# Altium PCB Time.PcbDoc
Units mm, origin at the board's own origin, x right, y up, seen from the top; angles counter-clockwise.
Board outline 121.25 x 38.25 mm, 2 copper layers (Top Layer, Bottom Layer); 114 components, 61 nets, 352 pads, 115 vias.
Unrouted connection lines stored in the file: 2.
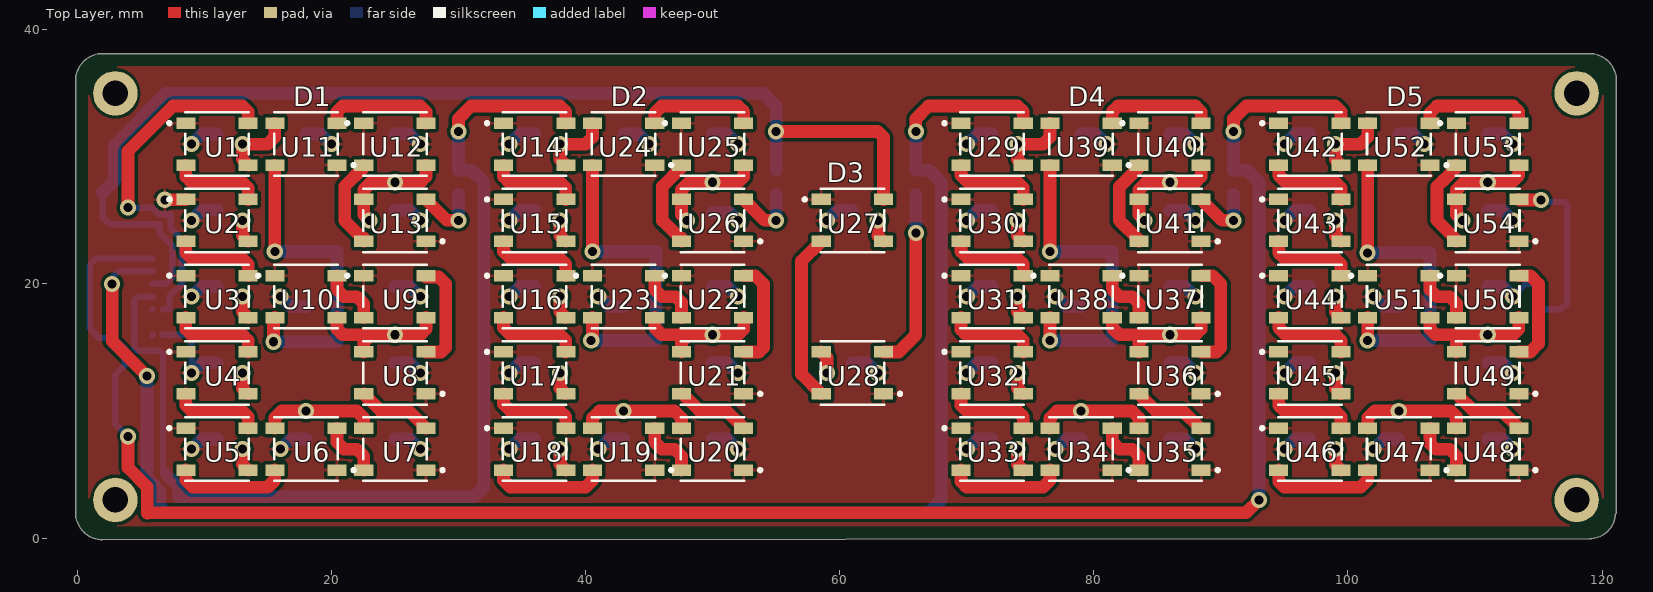
[diagram p0: Top Layer view]
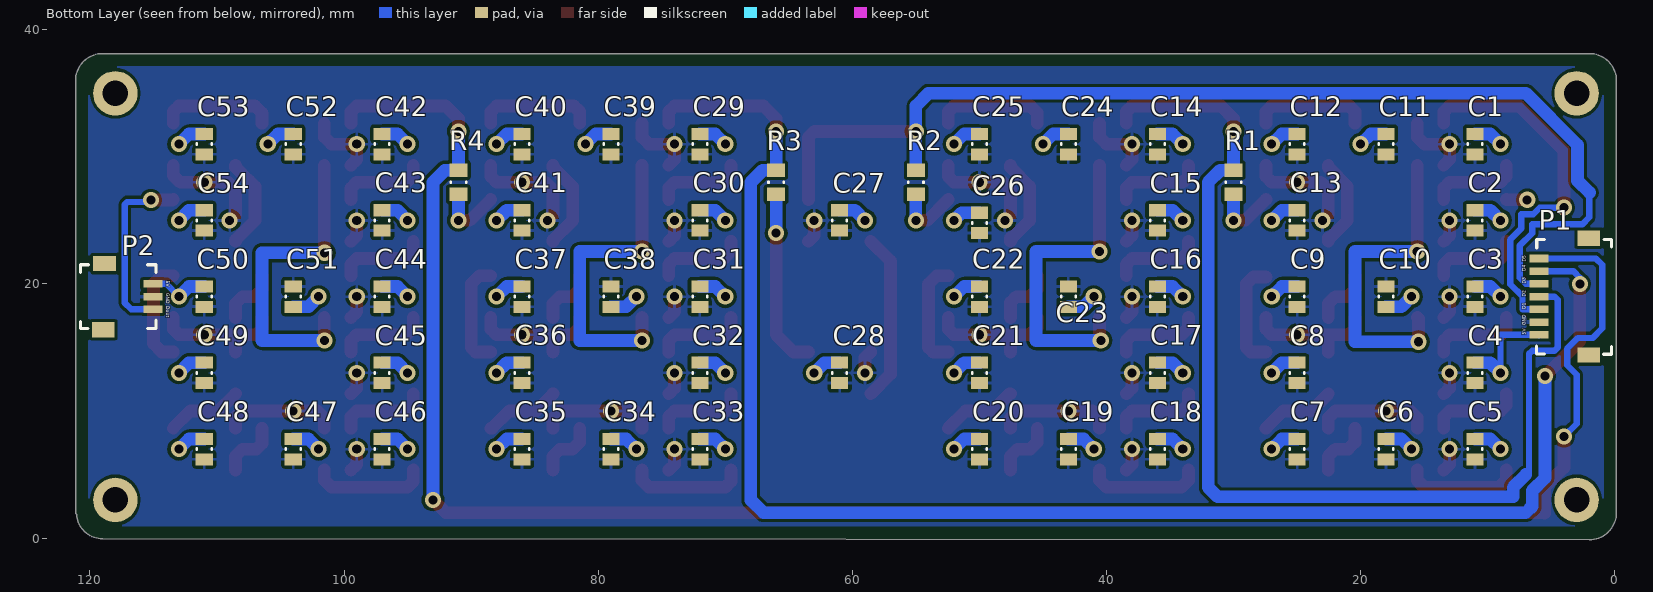
[diagram p1: Bottom Layer view, seen from below]
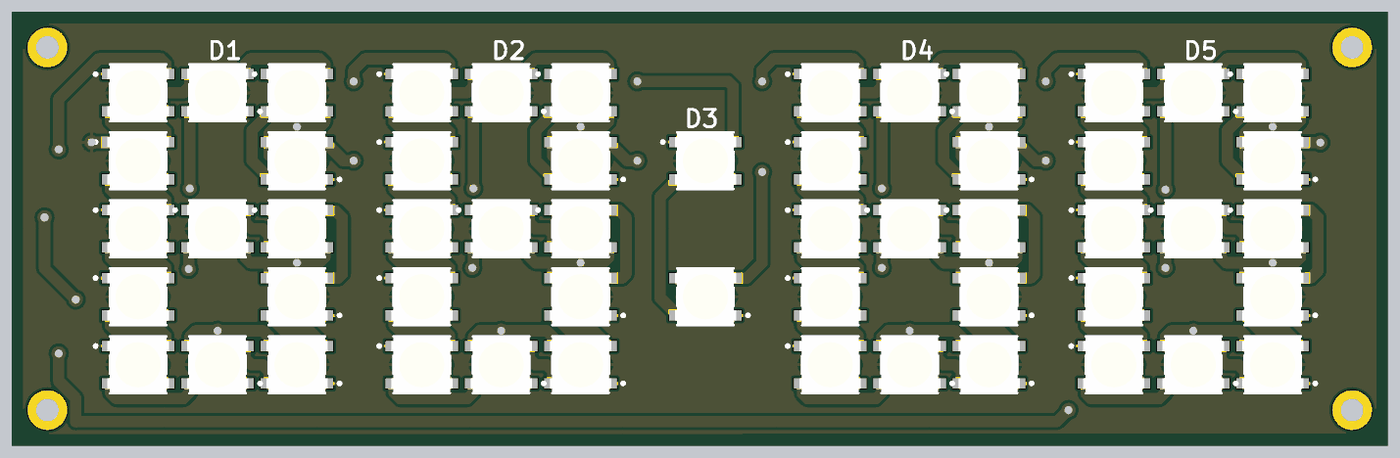
[diagram p2: 3D render of the assembled board from above, using the file's embedded part models]

## Layer stack, top to bottom
Top Solder: solder mask 0.0102, Solder Resist, Dk 3.5
Top Layer: signal copper 0.0356
Dielectric 1: dielectric 0.32, FR-4, Dk 4.8
Bottom Layer: signal copper 0.0356
Bottom Solder: solder mask 0.0102, Solder Resist, Dk 3.5

## Board outline
-0.127,2 -0.127,36 cw(c0,36) -0.127,36.001 cw(c2,36) 2,38.127 119,38.127 cw(c119,36) 121.127,36 121.127,2 cw(c121,2) 121.054,1.884 cw(c118.999,2) 119,-0.058 2,-0.127 cw(c1.997,1.997) -0.127,1.994 cw(c0,1.994) -0.127,1.997 cw(c0,2)

## Design rules (kind name [scope] priority, off if disabled: settings)
Clearance [All] p1: gap=0.254 ignorepadtopadclearanceinfootprint=FALSE except(0: Arc-Hole Track-Hole SMDPad-Hole THPad-Hole Via-Hole Fill-Hole Poly-Hole Region-Hole Text-Hole)
PolygonConnect [All] p1: connectstyle=Relief reliefconductorwidth=0.254 reliefentries=4 polygonreliefangle="90 Angle" airgapwidth=0.254
RoomDefinition Time [InComponentClass('Time')] p1: confinementstyle=ConfineIn formatcopy=TRUE lockcomponents=FALSE outline -1,-3 129,-3 129,42 -1,42
RoutingVias [All] p1: holewidth=0.711 width=1.27 viastyle="Through Hole" minholewidth=0.711 minwidth=1.27 maxholewidth=0.711 maxwidth=1.27
SolderMaskExpansion [All] p1: expansion=0.102
Width [All] p1: maxlimit=2 minlimit=0.5 preferedwidth=1
30 further rules are at their usual default settings.

## Components (designator, comment, footprint, x,y, rotation, side; value= is the part's Value field where it differs from the comment)
C1 "CAP 0.5pF 10V 0805(2012)" CAPC0805(2012)100_L 11,31 r90 bottom value=0.5pF
C2 "CAP 0.5pF 10V 0805(2012)" CAPC0805(2012)100_L 11,25 r90 bottom value=0.5pF
C3 "CAP 0.5pF 10V 0805(2012)" CAPC0805(2012)100_L 11,19 r90 bottom value=0.5pF
C4 "CAP 0.5pF 10V 0805(2012)" CAPC0805(2012)100_L 11,13 r90 bottom value=0.5pF
C5 "CAP 0.5pF 10V 0805(2012)" CAPC0805(2012)100_L 11,7 r90 bottom value=0.5pF
C6 "CAP 0.5pF 10V 0805(2012)" CAPC0805(2012)100_L 18,7 r90 bottom value=0.5pF
C7 "CAP 0.5pF 10V 0805(2012)" CAPC0805(2012)100_L 25,7 r90 bottom value=0.5pF
C8 "CAP 0.5pF 10V 0805(2012)" CAPC0805(2012)100_L 25,13 r90 bottom value=0.5pF
C9 "CAP 0.5pF 10V 0805(2012)" CAPC0805(2012)100_L 25,19 r90 bottom value=0.5pF
C10 "CAP 0.5pF 10V 0805(2012)" CAPC0805(2012)100_L 18,19 r270 bottom value=0.5pF
C11 "CAP 0.5pF 10V 0805(2012)" CAPC0805(2012)100_L 18,31 r90 bottom value=0.5pF
C12 "CAP 0.5pF 10V 0805(2012)" CAPC0805(2012)100_L 25,31 r90 bottom value=0.5pF
C13 "CAP 0.5pF 10V 0805(2012)" CAPC0805(2012)100_L 25,25 r90 bottom value=0.5pF
C14 "CAP 0.5pF 10V 0805(2012)" CAPC0805(2012)100_L 36,31 r90 bottom value=0.5pF
C15 "CAP 0.5pF 10V 0805(2012)" CAPC0805(2012)100_L 36,25 r90 bottom value=0.5pF
C16 "CAP 0.5pF 10V 0805(2012)" CAPC0805(2012)100_L 36,19 r90 bottom value=0.5pF
C17 "CAP 0.5pF 10V 0805(2012)" CAPC0805(2012)100_L 36,13 r90 bottom value=0.5pF
C18 "CAP 0.5pF 10V 0805(2012)" CAPC0805(2012)100_L 36,7 r90 bottom value=0.5pF
C19 "CAP 0.5pF 10V 0805(2012)" CAPC0805(2012)100_L 43,7 r90 bottom value=0.5pF
C20 "CAP 0.5pF 10V 0805(2012)" CAPC0805(2012)100_L 50,7 r90 bottom value=0.5pF
C21 "CAP 0.5pF 10V 0805(2012)" CAPC0805(2012)100_L 50,13 r90 bottom value=0.5pF
C22 "CAP 0.5pF 10V 0805(2012)" CAPC0805(2012)100_L 50,19 r90 bottom value=0.5pF
C23 "CAP 0.5pF 10V 0805(2012)" CAPC0805(2012)100_L 43,19 r270 bottom value=0.5pF
C24 "CAP 0.5pF 10V 0805(2012)" CAPC0805(2012)100_L 43,31 r90 bottom value=0.5pF
C25 "CAP 0.5pF 10V 0805(2012)" CAPC0805(2012)100_L 50,31 r90 bottom value=0.5pF
C26 "CAP 0.5pF 10V 0805(2012)" CAPC0805(2012)100_L 50,24.8 r90 bottom value=0.5pF
C27 "CAP 0.5pF 10V 0805(2012)" CAPC0805(2012)100_L 61,25 r90 bottom value=0.5pF
C28 "CAP 0.5pF 10V 0805(2012)" CAPC0805(2012)100_L 61,13 r90 bottom value=0.5pF
C29 "CAP 0.5pF 10V 0805(2012)" CAPC0805(2012)100_L 72,31 r90 bottom value=0.5pF
C30 "CAP 0.5pF 10V 0805(2012)" CAPC0805(2012)100_L 72,25 r90 bottom value=0.5pF
C31 "CAP 0.5pF 10V 0805(2012)" CAPC0805(2012)100_L 72,19 r90 bottom value=0.5pF
C32 "CAP 0.5pF 10V 0805(2012)" CAPC0805(2012)100_L 72,13 r90 bottom value=0.5pF
C33 "CAP 0.5pF 10V 0805(2012)" CAPC0805(2012)100_L 72,7 r90 bottom value=0.5pF
C34 "CAP 0.5pF 10V 0805(2012)" CAPC0805(2012)100_L 79,7 r90 bottom value=0.5pF
C35 "CAP 0.5pF 10V 0805(2012)" CAPC0805(2012)100_L 86,7 r90 bottom value=0.5pF
C36 "CAP 0.5pF 10V 0805(2012)" CAPC0805(2012)100_L 86,13 r90 bottom value=0.5pF
C37 "CAP 0.5pF 10V 0805(2012)" CAPC0805(2012)100_L 86,19 r90 bottom value=0.5pF
C38 "CAP 0.5pF 10V 0805(2012)" CAPC0805(2012)100_L 79,19 r270 bottom value=0.5pF
C39 "CAP 0.5pF 10V 0805(2012)" CAPC0805(2012)100_L 79,31 r90 bottom value=0.5pF
C40 "CAP 0.5pF 10V 0805(2012)" CAPC0805(2012)100_L 86,31 r90 bottom value=0.5pF
C41 "CAP 0.5pF 10V 0805(2012)" CAPC0805(2012)100_L 86,25 r90 bottom value=0.5pF
C42 "CAP 0.5pF 10V 0805(2012)" CAPC0805(2012)100_L 97,31 r90 bottom value=0.5pF
C43 "CAP 0.5pF 10V 0805(2012)" CAPC0805(2012)100_L 97,25 r90 bottom value=0.5pF
C44 "CAP 0.5pF 10V 0805(2012)" CAPC0805(2012)100_L 97,19 r90 bottom value=0.5pF
C45 "CAP 0.5pF 10V 0805(2012)" CAPC0805(2012)100_L 97,13 r90 bottom value=0.5pF
C46 "CAP 0.5pF 10V 0805(2012)" CAPC0805(2012)100_L 97,7 r90 bottom value=0.5pF
C47 "CAP 0.5pF 10V 0805(2012)" CAPC0805(2012)100_L 104,7 r90 bottom value=0.5pF
C48 "CAP 0.5pF 10V 0805(2012)" CAPC0805(2012)100_L 111,7 r90 bottom value=0.5pF
C49 "CAP 0.5pF 10V 0805(2012)" CAPC0805(2012)100_L 111,13 r90 bottom value=0.5pF
C50 "CAP 0.5pF 10V 0805(2012)" CAPC0805(2012)100_L 111,19 r90 bottom value=0.5pF
C51 "CAP 0.5pF 10V 0805(2012)" CAPC0805(2012)100_L 104,19 r270 bottom value=0.5pF
C52 "CAP 0.5pF 10V 0805(2012)" CAPC0805(2012)100_L 104,31 r90 bottom value=0.5pF
C53 "CAP 0.5pF 10V 0805(2012)" CAPC0805(2012)100_L 111,31 r90 bottom value=0.5pF
C54 "CAP 0.5pF 10V 0805(2012)" CAPC0805(2012)100_L 111,25 r90 bottom value=0.5pF
P1 "pico-clasp-7pins" "7 pins pico-clasp" 4,19 r90 bottom
P2 "pico-clasp-3pins" "3 pins pico-clasp" 117,19 r270 bottom
R1 "Jumper 0805(2012)" RESC0805(2012)_N 30,28 r90 bottom value="0.00 Ohm"
R2 "Jumper 0805(2012)" RESC0805(2012)_N 55,28 r90 bottom value="0.00 Ohm"
R3 "Jumper 0805(2012)" RESC0805(2012)_N 66,28 r270 bottom value="0.00 Ohm"
R4 "Jumper 0805(2012)" RESC0805(2012)_N 91,28 r270 bottom value="0.00 Ohm"
U1 "WS2812B" ADAI-WS2812B_V 11,31 r0 top
U2 "WS2812B" ADAI-WS2812B_V 11,25 r0 top
U3 "WS2812B" ADAI-WS2812B_V 11,19 r0 top
U4 "WS2812B" ADAI-WS2812B_V 11,13 r0 top
U5 "WS2812B" ADAI-WS2812B_V 11,7 r0 top
U6 "WS2812B" ADAI-WS2812B_V 18,7 r180 top
U7 "WS2812B" ADAI-WS2812B_V 25,7 r180 top
U8 "WS2812B" ADAI-WS2812B_V 25,13 r180 top
U9 "WS2812B" ADAI-WS2812B_V 25,19 r0 top
U10 "WS2812B" ADAI-WS2812B_V 18,19 r0 top
U11 "WS2812B" ADAI-WS2812B_V 18,31 r180 top
U12 "WS2812B" ADAI-WS2812B_V 25,31 r0 top
U13 "WS2812B" ADAI-WS2812B_V 25,25 r180 top
U14 "WS2812B" ADAI-WS2812B_V 36,31 r0 top
U15 "WS2812B" ADAI-WS2812B_V 36,25 r0 top
U16 "WS2812B" ADAI-WS2812B_V 36,19 r0 top
U17 "WS2812B" ADAI-WS2812B_V 36,13 r0 top
U18 "WS2812B" ADAI-WS2812B_V 36,7 r0 top
U19 "WS2812B" ADAI-WS2812B_V 43,7 r180 top
U20 "WS2812B" ADAI-WS2812B_V 50,7 r180 top
U21 "WS2812B" ADAI-WS2812B_V 50,13 r180 top
U22 "WS2812B" ADAI-WS2812B_V 50,19 r0 top
U23 "WS2812B" ADAI-WS2812B_V 43,19 r0 top
U24 "WS2812B" ADAI-WS2812B_V 43,31 r180 top
U25 "WS2812B" ADAI-WS2812B_V 50,31 r0 top
U26 "WS2812B" ADAI-WS2812B_V 50,25 r180 top
U27 "WS2812B" ADAI-WS2812B_V 61,25 r0 top
U28 "WS2812B" ADAI-WS2812B_V 61,13 r180 top
U29 "WS2812B" ADAI-WS2812B_V 72,31 r0 top
U30 "WS2812B" ADAI-WS2812B_V 72,25 r0 top
U31 "WS2812B" ADAI-WS2812B_V 72,19 r0 top
U32 "WS2812B" ADAI-WS2812B_V 72,13 r0 top
U33 "WS2812B" ADAI-WS2812B_V 72,7 r0 top
U34 "WS2812B" ADAI-WS2812B_V 79,7 r180 top
U35 "WS2812B" ADAI-WS2812B_V 86,7 r180 top
U36 "WS2812B" ADAI-WS2812B_V 86,13 r180 top
U37 "WS2812B" ADAI-WS2812B_V 86,19 r0 top
U38 "WS2812B" ADAI-WS2812B_V 79,19 r0 top
U39 "WS2812B" ADAI-WS2812B_V 79,31 r180 top
U40 "WS2812B" ADAI-WS2812B_V 86,31 r0 top
U41 "WS2812B" ADAI-WS2812B_V 86,25 r180 top
U42 "WS2812B" ADAI-WS2812B_V 97,31 r0 top
U43 "WS2812B" ADAI-WS2812B_V 97,25 r0 top
U44 "WS2812B" ADAI-WS2812B_V 97,19 r0 top
U45 "WS2812B" ADAI-WS2812B_V 97,13 r0 top
U46 "WS2812B" ADAI-WS2812B_V 97,7 r0 top
U47 "WS2812B" ADAI-WS2812B_V 104,7 r180 top
U48 "WS2812B" ADAI-WS2812B_V 111,7 r180 top
U49 "WS2812B" ADAI-WS2812B_V 111,13 r180 top
U50 "WS2812B" ADAI-WS2812B_V 111,19 r0 top
U51 "WS2812B" ADAI-WS2812B_V 104,19 r0 top
U52 "WS2812B" ADAI-WS2812B_V 104,31 r180 top
U53 "WS2812B" ADAI-WS2812B_V 111,31 r0 top
U54 "WS2812B" ADAI-WS2812B_V 111,25 r180 top

## Footprints (in the part's own frame and the unit in brackets; to place one, negate y for a bottom-side part, rotate by r counter-clockwise, add the part's x,y. Pads: shape width x height; smd on the part's side, far side on the other; paste and mask are expansions set on the pad)
"3 pins pico-clasp" [mm]
  rect 0.6x1.5 smd: 1(-1,1.95) 2(0,1.95) 3(1,1.95)
  rect 1.2x1.8 smd: ""(-2.6,-1.851) ""(2.6,-1.95)
  round 0.5 on Bottom Overlay: ""(-2,1.7)
  silkscreen extent -2.5,-3.75 2.5,2.2, body extent -2.5,-3.68 2.5,2.22, height 3.25
"7 pins pico-clasp" [mm]
  rect 0.6x1.5 smd: 1(-3.001,1.95) 2(-2.001,1.95) 3(-1.001,1.95) 4(-0.001,1.95) 5(1.002,1.95) 6(2.002,1.95) 7(3.002,1.95)
  rect 1.2x1.8 smd: ""(-4.601,-1.95) ""(4.602,-1.95)
  round 0.5 on Bottom Overlay: ""(-3.998,1.7)
  silkscreen extent -4.53,-3.75 4.5,2.15, body extent -4.5,-3.75 4.5,2.15, height 4.7
ADAI-WS2812B_V [mm] "SMD, 4-Leads, Body 5x5mm, Pitch 3.3mm"
  rect 1.5x0.9 smd: 1(-2.45,1.65) 2(-2.45,-1.65) 3(2.45,-1.65) 4(2.45,1.65)
  silkscreen extent -3.87,-2.5 2.5,2.5, body extent -2.7,-2.5 2.7,2.5, height 1.69
CAPC0805(2012)100_L [mm] "Chip Capacitor, Body 2.0x1.2mm, Height 1.0mm, IPC High Density"
  rect 0.95x1.35 smd: 1(-0.8,0) 2(0.8,0)
  silkscreen extent -0.05,-0.58 0.05,0.58, body extent -1.1,-0.72 1.1,0.72, height 1
RESC0805(2012)_N [mm] "Chip Resistor, Body 2.0x1.3mm, IPC Medium Density"
  rect 1.05x1.4 smd: 1(-0.95,0) 2(0.95,0)
  silkscreen extent -0.05,-0.6 0.05,0.6, body extent -1.1,-0.67 1.1,0.68, height 0.7

## Part data
C1 C2 C3 C4 C5 C6 C7 C8 C9 C10 C11 C12 C13 C14 C15 C16 C17 C18 C19 C20 C21 C22 C23 C24 C25 C26 C27 C28 C29 C30 C31 C32 C33 C34 C35 C36 C37 C38 C39 C40 C41 C42 C43 C44 C45 C46 C47 C48 C49 C50 C51 C52 C53 C54: library part CMP-1036-00005-1, "CAP 0.5pF 10V ±0.5pF 0805 (2012 Metric) Thickness 1mm SMD", Case-EIA=0805, Case-Metric=2012, Rated Voltage="10 V", Tolerance=±0.5pF, Max Thickness="1 mm", Technology=SMT
P1: library part pico-clasp-7, "7 pins pico clasp", Designator=P*
P2: library part pico-clasp-3, "3 pins pico clasp"
R1 R2 R3 R4: library part CMP-1013-00001-1, "Jumper 0805 (2012 Metric)", Case-EIA=0805, Case-Metric=2012, Power=None, Technology=SMT, Tolerance=None
U1 U2 U3 U4 U5 U6 U7 U8 U9 U10 U11 U12 U13 U14 U15 U16 U17 U18 U19 U20 U21 U22 U23 U24 U25 U26 U27 U28 U29 U30 U31 U32 U33 U34 U35 U36 U37 U38 U39 U40 U41 U42 U43 U44 U45 U46 U47 U48 U49 U50 U51 U52 U53 U54: library part CMP-1740-00005-1, "Intelligent Control LED Integrated Light Source, 3.5 to 5.3 V, -25 to 80 degC, 4-Pin SMD, RoHS, Bulk", Case\Package=Radial, Current Rating="240 mA", Max Operating Temperature="125 degC", Min Operating Temperature="-55 degC", Package Quantity=200, Tolerance=10%, ComponentLink1Description="Manufacturer URL", ComponentLink1URL=https://www.adafruit.com/, ComponentLink2Description=Datasheet, ComponentLink2URL=https://cdn-shop.adafruit.com/datasheets/WS2812B.pdf, DatasheetVersion=May-13, Height="12.2 mm", Lead Pitch="5 mm", Length="12.2 mm", Mount="Through Hole", PackageDescription="4-Pin Surface Mount Device, Body 5 x 5 mm, Pitch 3.3 mm", PackageReference=WS2812B, Packaging=Bulk, Pins=2, Radiation Hardening=No, REACH SVHC="No SVHC", RoHSCompliant=true, Shielding=Unshielded

## Free pads (board coordinates)
  round 3.5 hole 2: 2(3,3) 3(3,35) 4(118,3) 5(118,35)

## Via types
v1: diameter 1.27, hole 0.711, Top Layer to Bottom Layer, tented both sides, 115 vias

## Nets (pads, with @x,y where several pads share a name; then routed paths per layer and width w, separated by ;. In a path a pad name is that pad's centre, name@x,y a point inside that pad or via, vN(x,y) a via of type N, cw(c..) or ccw(c..) an arc to the next point about the centre after c; other vN are vias at no path point)
Din1: P1.3 U1.4 | length 28.8
  Top Layer w1: v1(4,26) 4,30.459 7.541,34 13,34 13.45,33.55 U1.4
  Bottom Layer w0.5: v1(4,26) 5.902,26 6.421,25.481 7.365,25.481 7.365,24.365 8.23,23.5 8.23,19.98 7.268,19.018 7.268,18 6.75,18
Din2: P1.4 R1.2 U14.4 | length 84.2
  Top Layer w1: v1(30,32) 30,33 31,34 38,34 38.45,33.55 U14.4
  Bottom Layer w0.5: P1.4 4.749,18.999 4.5,18.75 4.5,15 4.75,14.75 6.5,14.75 6.75,14.5 6.75,5.25 7,5
  Bottom Layer w1: 7,5 8,4 8,3.254 31.254,3.254 32,4 32,28 31.05,28.95 R1.2 v1(30,32)
Din3: P1.5 R2.2 U27.4 | length 89.9
  Top Layer w1: v1(55,32) 63,32 63.45,31.55 U27.4
  Bottom Layer w0.5: 2,27.186 2,25.25 2.544,24.706 6.5,24.706 6.5,24 7.476,23.024 7.476,20.479 6.999,20.002 P1.5 ; 5.948,18 5.95,17.999
  Bottom Layer w1: 2,27.186 2.938,28.124 2.938,30.938 7,35 54,35 55,34 v1(55,32) R2.2
Din4: P1.6 R3.1 U29.4 | length 126.5
  Top Layer w1: v1(2.75,20) 2.75,15.5 v1(5.5,12.75) ; v1(66,32) 66,33 67,34 74,34 74.45,33.55 U29.4
  Bottom Layer w0.5: v1(2.75,20) 2.75,20.5 3.252,21.002 P1.6
  Bottom Layer w1: v1(5.5,12.75) 5.5,4.727 6.5,3.727 6.5,2.5 7,2 67,2 68,3 68,28 67.05,28.95 R3.1 v1(66,32)
Din5: P1.7 R4.1 U42.4 | length 157.2
  Top Layer w1: v1(4,8) 4,5.541 5.504,4.037 5.504,1.963 5.541,2 92,2 v1(93,3) ; v1(91,32) 91,33 92,34 99,34 99.45,33.55 U42.4
  Bottom Layer w0.5: v1(4,8) 3,9 3,12.841 3.75,13.591 3.746,13.594 3.746,14.915 2.911,15.75 1.75,15.75 1,16.5 1,21.5 1.502,22.002 P1.7 ; 5.95,15.95 5.95,15.999
  Bottom Layer w1: v1(91,32) R4.1 92.05,28.95 93,28 v1(93,3)
Dout: P2.3 U54.2 | length 14.5
  Top Layer w1: U54.2 113.5,26.6 v1(115.2,26.6) v1@115.15,26.65
  Bottom Layer w0.5: P2.3 116.75,18 117.25,18.5 117.25,26.25 117.05,26.45 115.05,26.45 v1(115.2,26.6)
GND: C1.1 C2.1 C3.1 C4.1 C5.1 C6.1 C7.1 C8.1 C9.1 C10.1 C11.1 C12.1 C13.1 C14.1 C15.1 C16.1 C17.1 C18.1 C19.1 C20.1 C21.1 C22.1 C23.1 C24.1 C25.1 C26.1 C27.1 C28.1 C29.1 C30.1 C31.1 C32.1 C33.1 C34.1 C35.1 C36.1 C37.1 C38.1 C39.1 C40.1 C41.1 C42.1 C43.1 C44.1 C45.1 C46.1 C47.1 C48.1 C49.1 C50.1 C51.1 C52.1 C53.1 C54.1 P1.2 P2.2 U1.3 U2.3 U3.3 U4.3 U5.3 U6.3 U7.3 U8.3 U9.3 U10.3 U11.3 U12.3 U13.3 U14.3 U15.3 U16.3 U17.3 U18.3 U19.3 U20.3 U21.3 U22.3 U23.3 U24.3 U25.3 U26.3 U27.3 U28.3 U29.3 U30.3 U31.3 U32.3 U33.3 U34.3 U35.3 U36.3 U37.3 U38.3 U39.3 U40.3 U41.3 U42.3 U43.3 U44.3 U45.3 U46.3 U47.3 U48.3 U49.3 U50.3 U51.3 U52.3 U53.3 U54.3 | length 170.3
  Top Layer w1: v1(13,7) 13,5.8 U5.3 ; v1(13,13) 13,11.8 U4.3 ; v1(13,19) 13,17.8 U3.3 ; v1(13,25) 13,23.8 U2.3 ; U1.3 13,29.8 v1(13,31) 15,31 15.55,31.55 U11.3 ; U6.3 15.55,9.45 16.1,10 v1(18,10) 22,10 22.55,9.45 U7.3 ; U10.3 20.45,16.45 20.9,16 23.1,16 ; U8.3 22.55,15.45 23.1,16 ; v1(23,25) 22.55,25.45 U13.3 22.55,27.41 23.14,28 v1(25,28) 27,28 27.45,28.45 U12.3 ; U9.3 27.45,16.45 27,16 v1(25,16) 23.1,16 ; v1(38,7) 38,5.8 U18.3 ; v1(38,13) 38,11.8 U17.3 ; v1(38,19) 38,17.8 U16.3 ; v1(38,25) 38,23.8 U15.3 ; U14.3 38,29.8 v1(38,31) 40,31 40.55,31.55 U24.3 ; U19.3 40.55,9.45 41.1,10 v1(43,10) 47,10 47.55,9.45 U20.3 ; U23.3 45.45,16.55 46,16 48.1,16 ; U21.3 47.55,15.45 48.1,16 ; v1(48,25) 47.55,25.45 U26.3 47.55,27.41 48.14,28 v1(50,28) 52,28 52.45,28.45 U25.3 ; U22.3 52.45,16.45 52,16 v1(50,16) 48.1,16 ; U28.3 59,14.2 v1(59,13) ; v1(63,25) 63,23.8 U27.3 ; v1(74,7) 74,5.8 U33.3 ; v1(74,13) 74,11.8 U32.3 ; v1(74,19) 74,17.8 U31.3 ; v1(74,25) 74,23.8 U30.3 ; U29.3 74,29.8 v1(74,31) 76,31 76.55,31.55 U39.3 ; U34.3 76.55,9.45 77.1,10 v1(79,10) 83,10 83.55,9.45 U35.3 ; U38.3 81.45,16.55 82,16 84.1,16 ; U36.3 83.55,15.45 84.1,16 ; v1(84,25) 83.55,25.45 U41.3 83.55,27.41 84.14,28 v1(86,28) 88,28 88.45,28.45 U40.3 ; U37.3 88.45,16.45 88,16 v1(86,16) 84.1,16 ; v1(99,7) 99,5.8 U46.3 ; v1(99,13) 99,11.8 U45.3 ; v1(99,19) 99,17.8 U44.3 ; v1(99,25) 99,23.8 U43.3 ; U42.3 99,29.8 v1(99,31) 101,31 101.55,31.55 U52.3 ; U47.3 101.55,9.45 102.1,10 v1(104,10) 108.1,10 108.55,9.55 U48.3 ; U51.3 106.45,16.45 106.9,16 109,16 ; U49.3 108.55,15.55 109,16 ; v1(109,25) 108.55,25.45 U54.3 108.55,27.41 109.14,28 v1(111,28) 112.9,28 113.45,28.55 U53.3 ; U50.3 113.45,16.45 113,16 v1(111,16) 109,16
NetR1_1: R1.1 U13.2 | length 5.3
  Top Layer w1: U13.2 29.1,25 v1(30,25)
  Bottom Layer w1: v1(30,25) R1.1
NetR2_1: R2.1 U26.2 | length 5.3
  Top Layer w1: U26.2 54.1,25 v1(55,25)
  Bottom Layer w1: v1(55,25) R2.1
NetR3_2: R3.2 U28.2 | length 14.2
  Top Layer w1: U28.2 64.65,14.65 66,16 v1(66,24)
  Bottom Layer w1: v1(66,24) R3.2
NetR4_2: R4.2 U41.2 | length 5.3
  Top Layer w1: U41.2 90.1,25 v1(91,25)
  Bottom Layer w1: v1(91,25) R4.2
NetU1_2: U1.2 U2.4 | length 7.1
  Top Layer w1: U1.2 8.55,28.45 9,28 13,28 13.45,27.55 U2.4
NetU2_2: U2.2 U3.4 | length 7.1
  Top Layer w1: U2.2 8.55,22.45 9,22 13,22 13.45,21.55 U3.4
NetU3_2: U3.2 U4.4 | length 7.1
  Top Layer w1: U3.2 8.55,16.45 9,16 13,16 13.45,15.55 U4.4
NetU4_2: U4.2 U5.4 | length 7.1
  Top Layer w1: U4.2 8.55,10.45 9,10 13,10 13.45,9.55 U5.4
NetU5_2: U5.2 U6.4 | length 9.1
  Top Layer w1: U5.2 8.55,4.55 9.1,4 15,4 15.55,4.55 U6.4
NetU6_2: U6.2 U7.4 | length 4.8
  Top Layer w1: U6.2 20.45,7.55 21,7 22,7 22.55,6.45 U7.4
NetU7_2: U7.2 U8.4 | length 6
  Top Layer w1: U8.4 23.9,10 26.1,10 U7.2
NetU8_2: U8.2 U9.4 | length 8.5
  Top Layer w1: U8.2 28.65,14.65 29,15 29,20 28.45,20.55 U9.4@27.45,20.55
NetU9_2: U9.2 U10.4 | length 4.8
  Top Layer w1: U10.4 20.45,19.55 21,19 22,19 22.55,18.45 U9.2
NetU10_2: U10.2 U11.4 | length 25.7
  Top Layer w1: v1(15.45,15.45) 15.45,17.25 U10.2 ; v1(15.55,22.55) U11.4
  Bottom Layer w1: v1(15.45,15.45) 20.45,15.45 20.45,22.55 v1(15.55,22.55)
NetU11_2: U11.2 U12.4 | length 9.2
  Top Layer w1: U11.2 20.45,33.55 20.9,34 27,34 27.45,33.55 U12.4
NetU12_2: U12.2 U13.4 | length 7.3
  Top Layer w1: U13.4 22.55,23.611 22.425,23.611 21.046,24.99 21.046,27.68 22.55,29.184 U12.2
NetU14_2: U14.2 U15.4 | length 7.1
  Top Layer w1: U14.2 33.55,28.45 34,28 38,28 38.45,27.55 U15.4
NetU15_2: U15.2 U16.4 | length 7
  Top Layer w1: U15.2 33.55,22.55 34.1,22 38,22 38.45,21.55 U16.4
NetU16_2: U16.2 U17.4 | length 7
  Top Layer w1: U16.2 33.55,16.55 34.1,16 38,16 38.45,15.55 U17.4
NetU17_2: U17.2 U18.4 | length 7
  Top Layer w1: U17.2 33.55,10.55 34.1,10 38,10 38.45,9.55 U18.4
NetU18_2: U18.2 U19.4 | length 9.1
  Top Layer w1: U18.2 33.55,4.55 34.1,4 40,4 40.55,4.55 U19.4
NetU19_2: U19.2 U20.4 | length 4.8
  Top Layer w1: U19.2 45.45,7.55 46,7 47,7 47.55,6.45 U20.4
NetU20_2: U20.2 U21.4 | length 6
  Top Layer w1: U21.4 47.65,11.35 49,10 51.1,10 U20.2
NetU21_2: U21.2 U22.4 | length 8.5
  Top Layer w1: U21.2 53.65,14.65 54,15 54,20 53.35,20.65 U22.4
NetU22_2: U22.2 U23.4 | length 4.8
  Top Layer w1: U23.4 45.45,19.55 46,19 47.1,19 47.55,18.55 U22.2
NetU23_2: U23.2 U24.4 | length 25.7
  Top Layer w1: v1(40.45,15.55) 40.55,15.65 U23.2 ; v1(40.55,22.55) U24.4
  Bottom Layer w1: v1(40.45,15.55) 45.55,15.55 45.55,22.55 v1(40.55,22.55)
NetU24_2: U24.2 U25.4 | length 9.1
  Top Layer w1: U24.2 45.45,33.45 46,34 52,34 52.45,33.55 U25.4
NetU25_2: U25.2 U26.4 | length 7.3
  Top Layer w1: U26.4 47.55,23.611 47.425,23.611 46.046,24.99 46.046,27.68 47.55,29.184 U25.2
NetU27_2: U27.2 U28.4 | length 13.3
  Top Layer w1: U28.4 57,12.9 57,21.8 U27.2
NetU29_2: U29.2 U30.4 | length 7
  Top Layer w1: U29.2 69.55,28.55 70.1,28 74,28 74.45,27.55 U30.4
NetU30_2: U30.2 U31.4 | length 7
  Top Layer w1: U30.2 69.55,22.55 70.1,22 74,22 74.45,21.55 U31.4
NetU31_2: U31.2 U32.4 | length 7.1
  Top Layer w1: U31.2 69.55,16.404 69.954,16 74,16 74.45,15.55 U32.4
NetU32_2: U32.2 U33.4 | length 7.1
  Top Layer w1: U32.2 69.55,10.45 70,10 74,10 74.45,9.55 U33.4
NetU33_2: U33.2 U34.4 | length 9.1
  Top Layer w1: U33.2 69.55,4.45 70,4 76,4 76.55,4.55 U34.4
NetU34_2: U34.2 U35.4 | length 4.8
  Top Layer w1: U34.2 81.45,7.55 82,7 83,7 83.55,6.45 U35.4
NetU35_2: U35.2 U36.4 | length 6
  Top Layer w1: U36.4 84.9,10 87,10 88.35,8.65 U35.2
NetU36_2: U36.2 U37.4 | length 8.5
  Top Layer w1: U36.2 89.65,14.65 90,15 90,20 89.35,20.65 U37.4
NetU37_2: U37.2 U38.4 | length 4.8
  Top Layer w1: U38.4 81.45,19.55 82,19 83,19 83.55,18.45 U37.2
NetU38_2: U38.2 U39.4 | length 25.4
  Top Layer w1: v1(76.55,15.55) U38.2 ; v1(76.55,22.55) U39.4
  Bottom Layer w1: v1(76.55,15.55) 81.45,15.55 81.45,22.55 v1(76.55,22.55)
NetU39_2: U39.2 U40.4 | length 9.2
  Top Layer w1: U39.2 81.45,33.55 81.9,34 88,34 88.45,33.55 U40.4
NetU40_2: U40.2 U41.4 | length 7.3
  Top Layer w1: U41.4 83.55,23.45 82,25 82,27.634 83.55,29.184 U40.2
NetU42_2: U42.2 U43.4 | length 7
  Top Layer w1: U42.2 94.55,28.55 95.1,28 99,28 99.45,27.55 U43.4
NetU43_2: U43.2 U44.4 | length 7.1
  Top Layer w1: U43.2 94.55,22.45 95,22 99,22 99.45,21.55 U44.4
NetU44_2: U44.2 U45.4 | length 7
  Top Layer w1: U44.2 94.55,16.55 95.1,16 99,16 99.45,15.55 U45.4
NetU45_2: U45.2 U46.4 | length 7.1
  Top Layer w1: U45.2 94.55,10.45 95,10 99,10 99.45,9.55 U46.4
NetU46_2: U46.2 U47.4 | length 9.1
  Top Layer w1: U46.2 94.55,4.45 95,4 101,4 101.55,4.55 U47.4
NetU47_2: U47.2 U48.4 | length 4.8
  Top Layer w1: U47.2 106.45,7.45 106.9,7 108,7 108.55,6.45 U48.4
NetU48_2: U48.2 U49.4 | length 6
  Top Layer w1: U49.4 109.9,10 112.1,10 U48.2
NetU49_2: U49.2 U50.4 | length 8.3
  Top Layer w1: U49.2 114.35,14.65 115,15.3 115,20 114.35,20.65 U50.4
NetU50_2: U50.2 U51.4 | length 4.8
  Top Layer w1: U51.4 106.45,19.55 107,19 108,19 108.55,18.45 U50.2
NetU51_2: U51.2 U52.4 | length 25.4
  Top Layer w1: v1(101.55,15.55) U51.2 ; v1(101.55,22.45) U52.4
  Bottom Layer w1: v1(101.55,15.55) 106.45,15.55 106.45,22.45 v1(101.55,22.45)
NetU52_2: U52.2 U53.4 | length 9.1
  Top Layer w1: U52.2 106.45,33.45 107,34 113,34 113.45,33.55 U53.4
NetU53_2: U53.2 U54.4 | length 7.3
  Top Layer w1: U54.4 108.55,23.45 107,25 107,27.673 107.473,28.146 107.512,28.146 108.55,29.184 U53.2
VCC: C1.2 C2.2 C3.2 C4.2 C5.2 C6.2 C7.2 C8.2 C9.2 C10.2 C11.2 C12.2 C13.2 C14.2 C15.2 C16.2 C17.2 C18.2 C19.2 C20.2 C21.2 C22.2 C23.2 C24.2 C25.2 C26.2 C27.2 C28.2 C29.2 C30.2 C31.2 C32.2 C33.2 C34.2 C35.2 C36.2 C37.2 C38.2 C39.2 C40.2 C41.2 C42.2 C43.2 C44.2 C45.2 C46.2 C47.2 C48.2 C49.2 C50.2 C51.2 C52.2 C53.2 C54.2 P1.1 P2.1 U1.1 U2.1 U3.1 U4.1 U5.1 U6.1 U7.1 U8.1 U9.1 U10.1 U11.1 U12.1 U13.1 U14.1 U15.1 U16.1 U17.1 U18.1 U19.1 U20.1 U21.1 U22.1 U23.1 U24.1 U25.1 U26.1 U27.1 U28.1 U29.1 U30.1 U31.1 U32.1 U33.1 U34.1 U35.1 U36.1 U37.1 U38.1 U39.1 U40.1 U41.1 U42.1 U43.1 U44.1 U45.1 U46.1 U47.1 U48.1 U49.1 U50.1 U51.1 U52.1 U53.1 U54.1 | length 135.2
  Top Layer w1: v1(6.893,26.62) 8.52,26.62 U2.1
  Bottom Layer w0.5: 6.704,16 9,16 v1(9,13) ; v1(113,19) 114,20 P2.1
  Bottom Layer w1: v1(9,7) 9.8,7.8 C5.2 ; v1(9,13) 9.8,13.8 C4.2 ; v1(9,19) 9.8,19.8 C3.2 ; v1(9,25) 9.8,25.8 C2.2 ; v1(9,31) 9.8,31.8 C1.2 ; v1(16,7) 16.8,7.8 C6.2 ; v1(16,19) 16.8,18.2 C10.2 ; C11.2 19.2,31.8 v1(20,31) ; C7.2 26.2,7.8 v1(27,7) ; C8.2 26.2,13.8 v1(27,13) ; C9.2 26.2,19.8 v1(27,19) ; C13.2 26.2,25.8 v1(27,25) ; C12.2 26.2,31.8 v1(27,31) ; v1(34,7) 34.8,7.8 C18.2 ; v1(34,13) 34.8,13.8 C17.2 ; v1(34,19) 34.8,19.8 C16.2 ; v1(34,25) 34.8,25.8 C15.2 ; v1(34,31) 34.8,31.8 C14.2 ; v1(41,7) 41.8,7.8 C19.2 ; v1(41,19) 41.8,18.2 C23.2 ; C24.2 44.2,31.8 v1(45,31) ; C20.2 51.2,7.8 v1(52,7) ; C21.2 51.2,13.8 v1(52,13) ; C22.2 51.2,19.8 v1(52,19) ; C26.2 51.4,25.6 v1(52,25) ; C25.2 51.2,31.8 v1(52,31) ; v1(59,25) 59.8,25.8 C27.2 ; C28.2 62.2,13.8 v1(63,13) ; v1(70,7) 70.8,7.8 C33.2 ; v1(70,13) 70.8,13.8 C32.2 ; v1(70,19) 70.8,19.8 C31.2 ; v1(70,25) 70.8,25.8 C30.2 ; v1(70,31) 70.8,31.8 C29.2 ; v1(77,7) 77.8,7.8 C34.2 ; v1(77,19) 77.8,18.2 C38.2 ; C39.2 80.2,31.8 v1(81,31) ; C35.2 87.2,7.8 v1(88,7) ; C36.2 87.2,13.8 v1(88,13) ; C37.2 87.2,19.8 v1(88,19) ; C41.2 87.2,25.8 v1(88,25) ; C40.2 87.2,31.8 v1(88,31) ; v1(95,7) 95.8,7.8 C46.2 ; v1(95,13) 95.8,13.8 C45.2 ; v1(95,19) 95.8,19.8 C44.2 ; v1(95,25) 95.8,25.8 C43.2 ; v1(95,31) 95.8,31.8 C42.2 ; v1(102,7) 102.8,7.8 C47.2 ; v1(102,19) 102.8,18.2 C51.2 ; C52.2 105.2,31.8 v1(106,31) ; C48.2 112.2,7.8 v1(113,7) ; C49.2 112.2,13.8 v1(113,13) ; C50.2 112.2,19.8 v1(113,19) ; C54.2 112.2,25.8 v1(113,25) ; C53.2 112.2,31.8 v1(113,31)
pads on no net: P1. P2.

## Polygon pours and split planes (outlines as drawn)
GND on Bottom Layer "GND_L02_P006" (solid, pour order 6): 0.873,2.994 cw(c1,2.994) 0.873,2.997 cw(c1,3) 0.873,3 0.873,35 cw(c3,35) 3,37.127 118,37.127 ccw(c118,37) 117.999,37.127 118,37.127 cw(c118,35) 120.127,35 120.127,3 cw(c120,3) 120.123,2.966 cw(c120,2.931) 120.127,2.931 cw(c120,2.931) 120.127,2.929 cw(c118.034,2.966) 117.998,0.873 cw(c118,1) 117.887,0.941 3,0.873 cw(c2.997,2.997)
VCC on Top Layer "VCC_L01_P007" (solid, pour order 7): 0.873,2.994 cw(c1,2.994) 0.873,2.997 cw(c1,3) 0.873,3 0.873,35 cw(c3,35) 3,37.127 118,37.127 ccw(c118,37) 117.999,37.127 118,37.127 cw(c118,35) 120.127,35 120.127,3 cw(c120,3) 120.123,2.966 cw(c120,2.931) 120.127,2.931 cw(c120,2.931) 120.127,2.929 cw(c118.034,2.966) 117.998,0.873 cw(c118,1) 117.887,0.941 3,0.873 cw(c2.997,2.997)

## Silkscreen, mask and mechanical layers (free items; w line width, h text height)
Top Overlay:
  text "D1" at 17,34 h1.52
  text "D2" at 42,34 h1.52
  text "D4" at 78,34 h1.52
  text "D5" at 103,34 h1.52
  text "D3" at 59,28 h1.52
Bottom Overlay:
  text "D5" at 7,21.75 h0.25 r270
  text "D4" at 7,21 h0.25 r270
  text "5V" at 114,20.25 h0.25 r90
  text "D3" at 7,20 h0.25 r270
  text "GND" at 114,19.25 h0.25 r90
  text "D2" at 7,19 h0.25 r270
  text "Dout" at 114,18.25 h0.25 r90
  text "D1" at 7,18 h0.25 r270
  text "GND" at 7,16.75 h0.25 r270
  text "5V" at 7,16 h0.25 r270
Mechanical 1:
  lines w0.254: 0,1.994 ccw(c1.997,1.997) 2,0 119,0.069 ; 0,2 0,36 cw(c2,36) 2,38 119,38 cw(c119,36) 121,36 121,2 ; 118.965,0.07 ccw(c118.999,2) 120.929,1.966